# EAGLE board RFBoard_v4.0_1_ResonatorPCB_Marian_Oliver (EAGLE 7.7.0)
AUTHOR: Kirchschlager Raimund
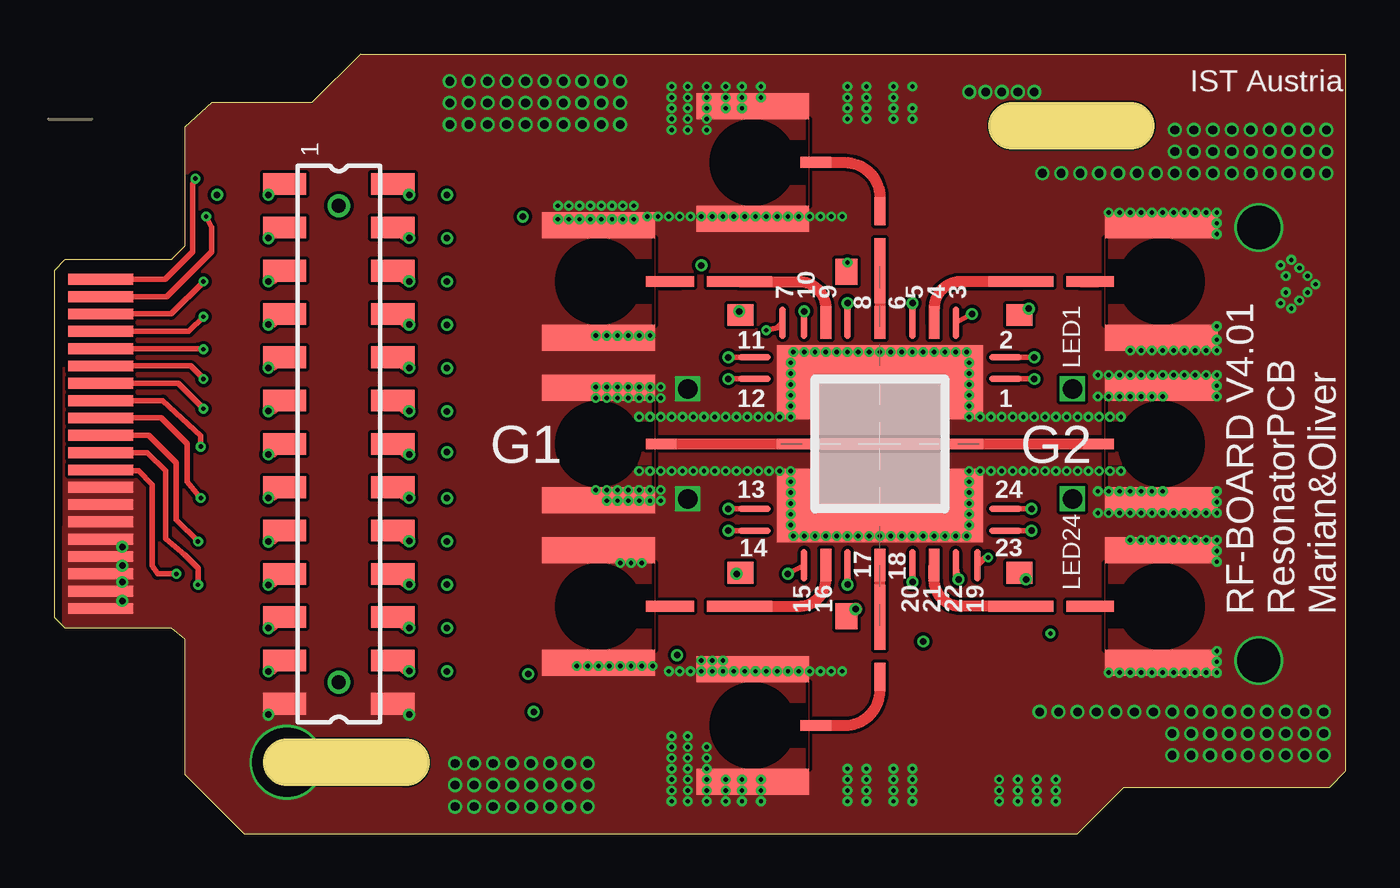
[diagram p0: board, top side]
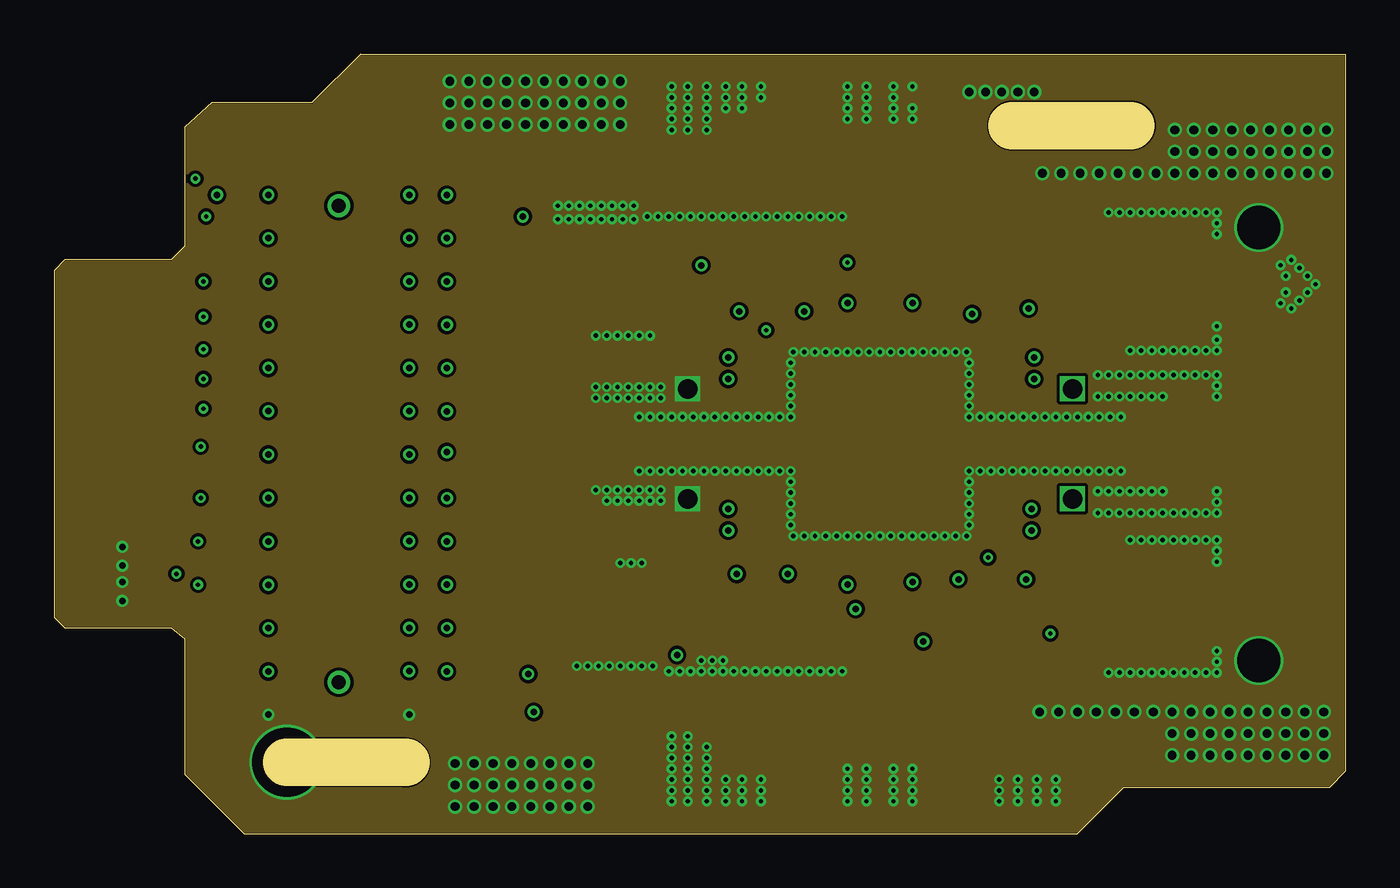
[diagram p1: board, inner layer Route2]
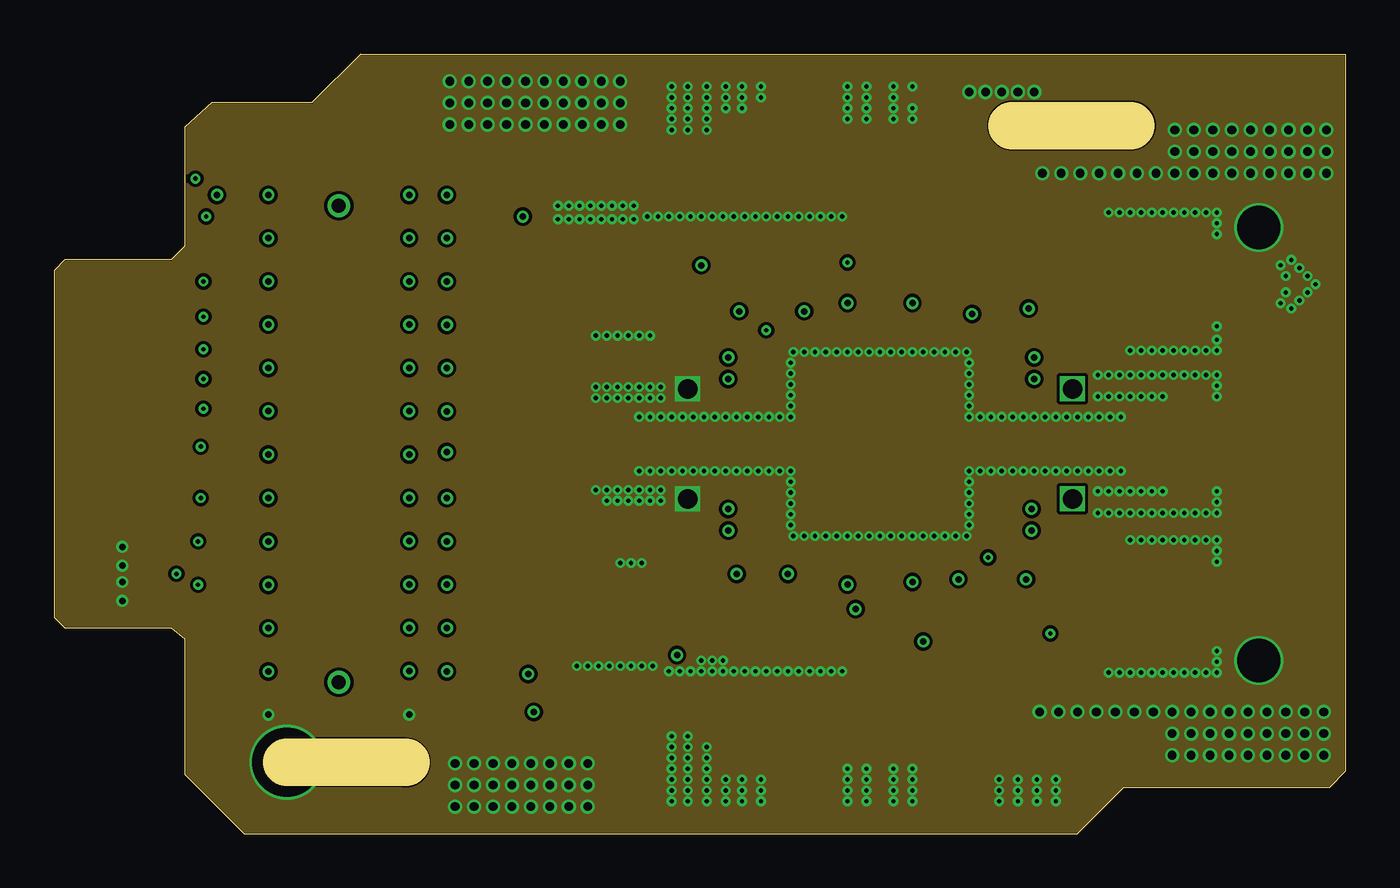
[diagram p2: board, inner layer Route3]
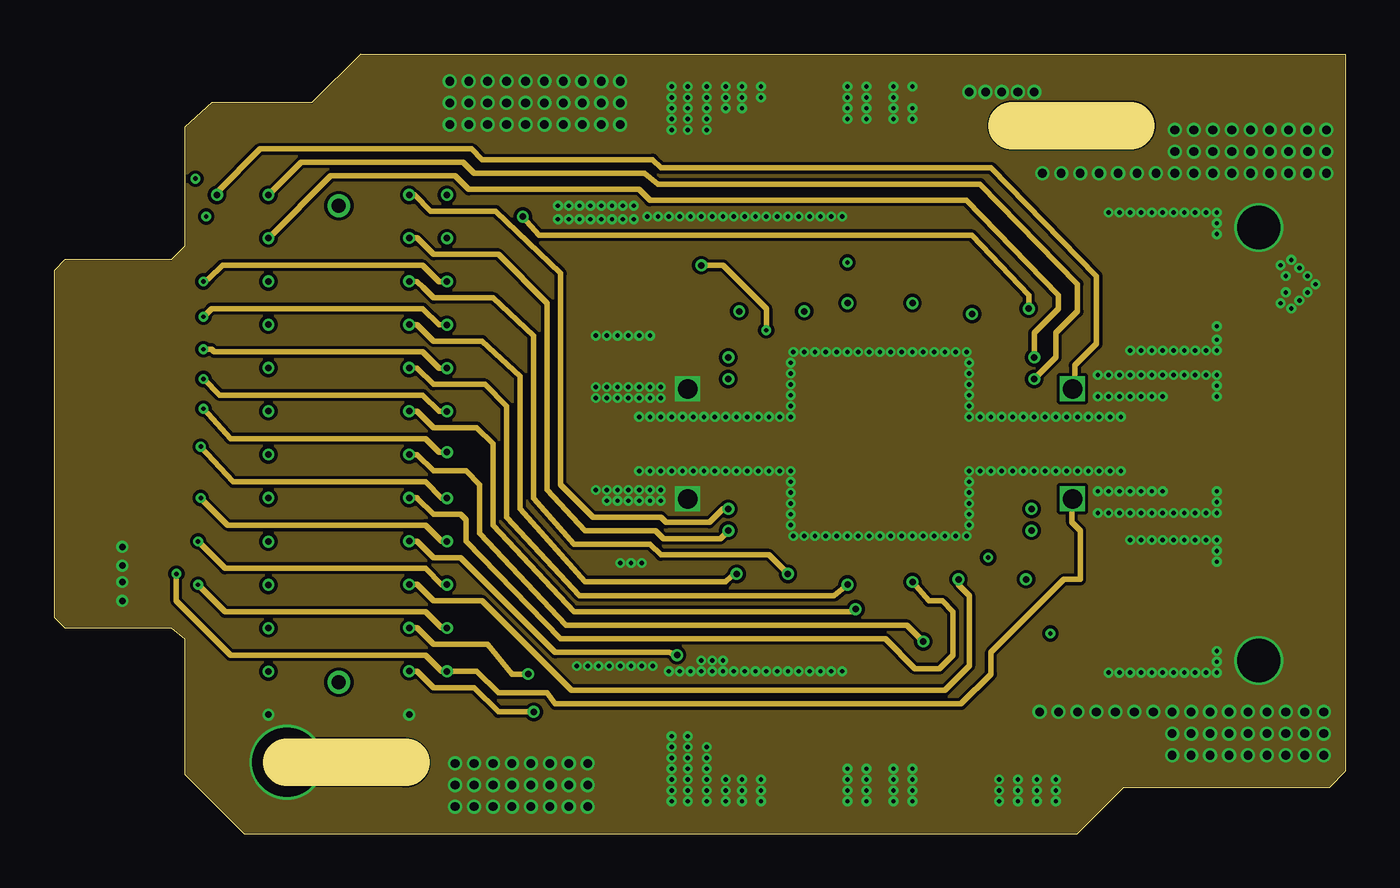
[diagram p3: board, inner layer Route14]
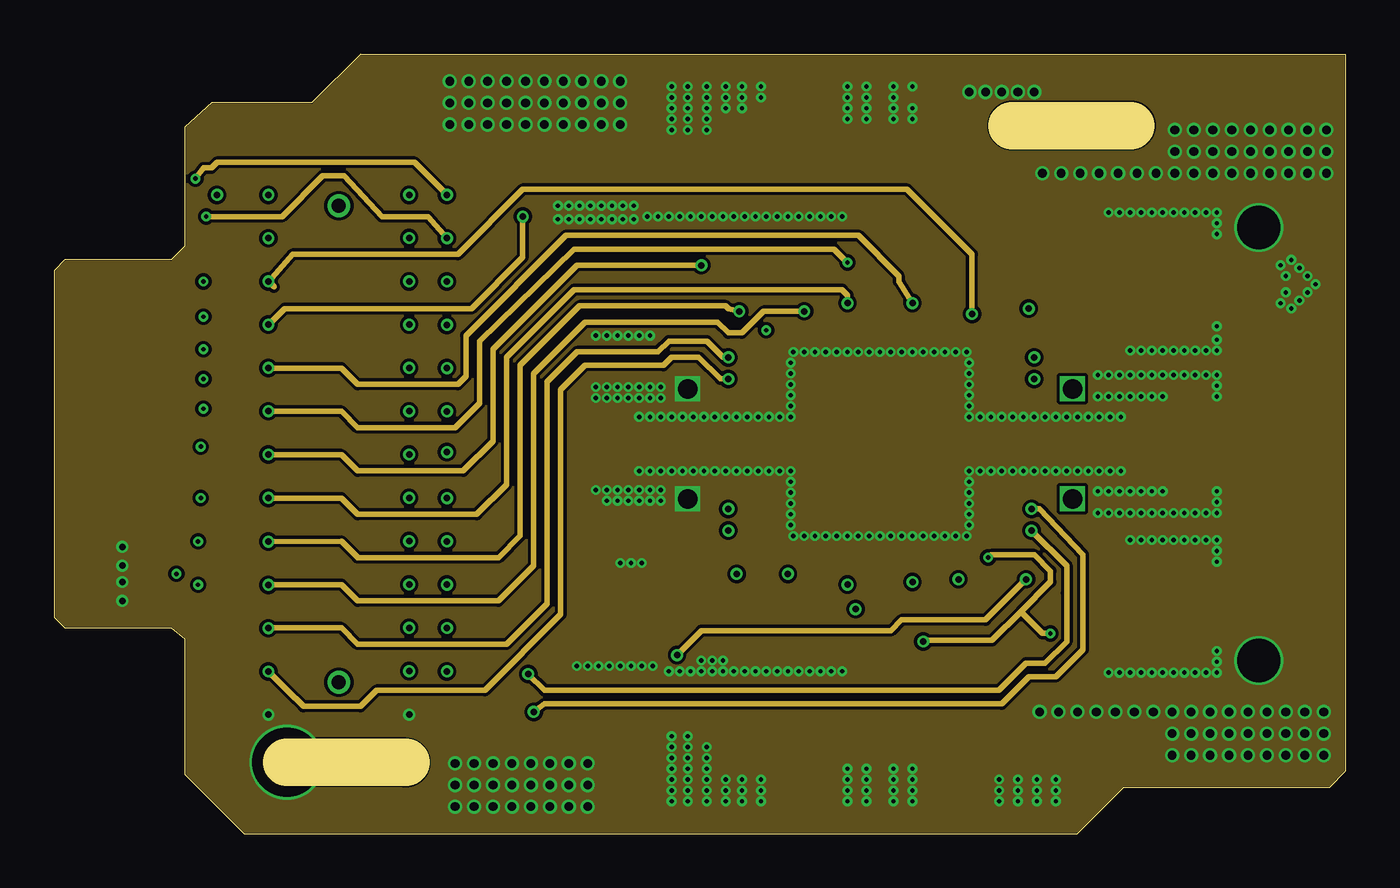
[diagram p4: board, inner layer Route15]
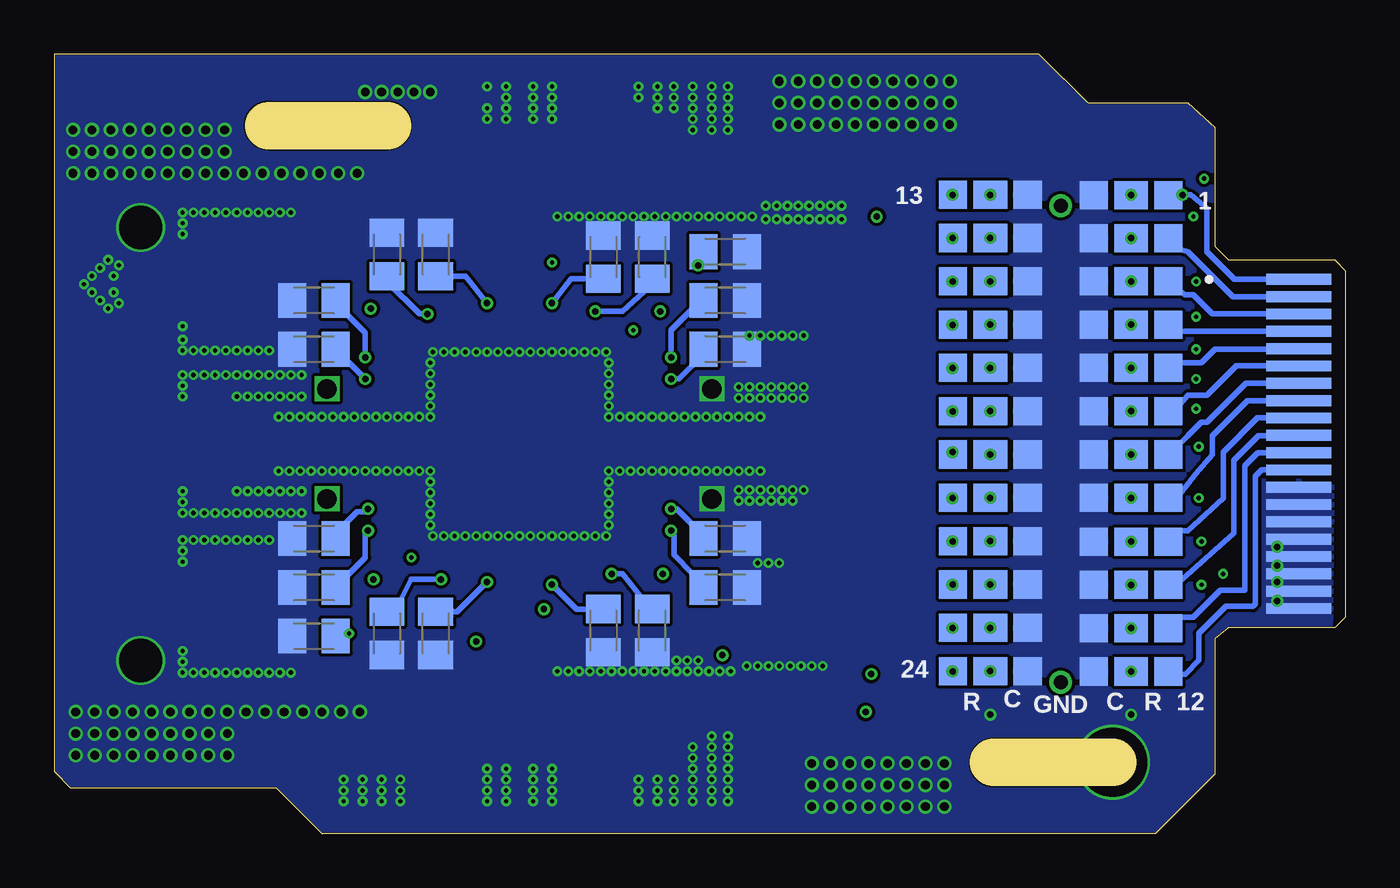
[diagram p5: board, bottom side, seen from below]

Size 59.65 x 36 mm. Coordinates in mm from the lower left corner, seen from the top.
Outline: 16.25,3.3 10.75,3.3
Outline: 49.75,32.7 44.25,32.7
Outline: 14.15,36 11.9,33.75 7.27,33.75 6.02,32.62 6.02,27.12 5.4,26.5 0.5,26.5 0,26 0,10 0.5,9.5 5.4,9.5 6.02,9 6.02,2.75 8.77,0 47.27,0 49.4,2.12 58.9,2.12 59.65,2.88 59.65,36 14.15,36
Copper layers (1+2+3*14+15+16): Top 0.035mm / dielectric 0.2mm / Route2 0.035mm / dielectric 1mm / Route3 0.035mm / dielectric 0.28mm / Route14 0.035mm / dielectric 0.36mm / Route15 0.035mm / dielectric 0.2mm / Bottom 0.035mm
Design rules "PCB-POOL HighSpec_ML6+ *": minimum track width 0.125mm, minimum drill 0.2mm, track to track 0.125mm, track to pad 0.125mm, pad to pad 0.125mm, via to via 0.125mm, smd to smd 0.125mm, copper to edge 2mil, drill to drill 0.2mm, minimum pad ring 0.2mm, minimum via ring 0.125mm, stop-mask expansion 0.065mm, vias tented up to drill 0.3mm, thermal gap 0mil
Net classes: 0 GND: clearance 0.15 mm; 1 RF: width 0.6 mm, clearance 0.75 mm; 2 RF2: width 0.6 mm, clearance 0.75 mm
tRestrict: area 23.1,8.5 to 27.1,12.5

## Footprints (pad centres in the part's own frame; a part is rotated, then mirrored left to right if it is on the bottom)
C0805K = smd 1.3 x 1.6: 1 -1,0; 2 1,0
SMP_STRAIGHT_MINI_WIDE_V1_01_ROUND = smd 0.5 x 1.4: 1 0,2.9 | smd 1.2 x 5.2: GND -2.6,0; GND@1 2.6,0
SAMTEC_MEC8-120-XX-X-D-EM2_MATCH = smd 0.5 x 3: 1 -7.6,0; 3 -6.8,0; 5 -6,0; 7 -5.2,0; 9 -4.4,0; 11 -3.6,0; 13 -2.8,0; 15 -2,0; 17 -1.2,0; 19 -0.4,0; 21 0.4,0; 23 1.2,0; 25 2,0; 27 2.8,0; 29 3.6,0; 31 4.4,0; 33 5.2,0; 35 6,0; 37 6.8,0; 39 7.6,0 | smd 0.5 x 3 bottom: 2 -7.6,0; 4 -6.8,0; 6 -6,0; 8 -5.2,0; 10 -4.4,0; 12 -3.6,0; 14 -2.8,0; 16 -2,0; 18 -1.2,0; 20 -0.4,0; 22 0.4,0; 24 1.2,0; 26 2,0; 28 2.8,0; 30 3.6,0; 32 4.4,0; 34 5.2,0; 36 6,0; 38 6.8,0; 40 7.6,0
LP-FILTER/1_STAGE/OS/0603_TOP = smd 1.3 x 1.3: $1 -1.6,0.01; $6 1.85,0.01 | smd 1.55 x 1.3: $4 0.125,0.01
LP-FILTER/1_STAGE/OS/0603_BOTTOM = smd 1.3 x 1.3 bottom: $1 -1.6,0.01; $6 1.85,0.01 | smd 1.55 x 1.3 bottom: $4 0.125,0.01
24DC+4FASTGATE+2RF/6.0X6.0_V2.11 = smd 1.5 x 0.3: DC§01 5.8,3; DC§02 5.8,4; DC§11 -5.8,4; DC§12 -5.8,3; DC§13 -5.8,-3; DC§14 -5.8,-4; DC§23 5.8,-4; DC§24 5.8,-3 | smd 0.3 x 1.5: DC§03 3.5,5.6; DC§05 1.5,5.6; DC§07 -4.5,5.6; DC§08 -1.5,5.6; DC§10 -3.5,5.6; DC§15 -3.5,-5.6; DC§17 -1.5,-5.6; DC§19 4.5,-5.6; DC§20 1.5,-5.6; DC§22 3.5,-5.6 | smd 0.5 x 1.5: DC§04 2.5,5.6; DC§06 0,5.6; DC§09 -2.5,5.6; DC§16 -2.5,-5.6; DC§18 0,-5.6; DC§21 2.5,-5.6 | smd 6.5 x 1.7: GND 0,3.7; GND5 0,-3.7 | smd 1.9 x 3.4: GND1 3.8,2.85; GND2 3.8,-2.85; GND3 -3.8,-2.85; GND4 -3.8,2.85 | smd 1.9 x 0.5: RF$1 -3.8,0; RF$2 3.8,0
BIAS_TEE_UP_0603_THIN = smd 1.3 x 0.5: HF 3.25,0 | smd 1.2 x 1: LF 0.45,-1.55 | smd 3 x 0.5: OUT 0.5,0
BIAS_TEE_DOWN_0603_THIN = smd 1.3 x 0.5: HF 3.25,0 | smd 1.2 x 1: LF 0.45,1.55 | smd 3 x 0.5: OUT 0.5,0
SMD2X13 = drill 0.65: MOUNT1 -11,0; MOUNT2 11,0 | smd 1 x 2: P$1 -12,-2.5; P$2 -12,2.5; P$3 -10,-2.5; P$4 -10,2.5; P$5 -8,-2.5; P$6 -8,2.5; P$7 -6,-2.5; P$8 -6,2.5; P$9 -4,-2.5; P$10 -4,2.5; P$11 -2,-2.5; P$12 -2,2.5; P$13 0,-2.5; P$14 0,2.5; P$15 2,-2.5; P$16 2,2.5; P$17 4,-2.5; P$18 4,2.5; P$19 6,-2.5; P$20 6,2.5; P$21 8,-2.5; P$22 8,2.5; P$23 10,-2.5; P$24 10,2.5; P$25 12,-2.5; P$26 12,2.5

## Placement (x,y rotation side)
C1  [C0805K]  47.65,22.38 0 bottom
C2  [C0805K]  47.65,24.62 0 bottom
C3  [C0805K]  44.27,26.75 270 bottom
C5  [C0805K]  42.02,26.75 270 bottom
C7  [C0805K]  28.65,26.88 180 bottom
C8  [C0805K]  34.27,26.62 270 bottom
C10  [C0805K]  32.02,26.62 270 bottom
C11  [C0805K]  28.65,24.62 180 bottom
C12  [C0805K]  28.65,22.38 180 bottom
C13  [C0805K]  28.65,13.62 180 bottom
C14  [C0805K]  28.65,11.38 180 bottom
C15  [C0805K]  32.02,9.38 90 bottom
C17  [C0805K]  34.27,9.38 90 bottom
C19  [C0805K]  47.65,9.12 0 bottom
C20  [C0805K]  42.02,9.25 90 bottom
C22  [C0805K]  44.27,9.25 90 bottom
C23  [C0805K]  47.65,11.38 0 bottom
C24  [C0805K]  47.65,13.62 0 bottom
G1  MC-921  [SMP_STRAIGHT_MINI_WIDE_V1_01_ROUND]  25.15,18 270 top
G2  MC-921  [SMP_STRAIGHT_MINI_WIDE_V1_01_ROUND]  51.15,18 90 top
J1  MEC8-120-XX-X-D-EM2MATCH  [SAMTEC_MEC8-120-XX-X-D-EM2_MATCH]  2.15,18 270 bottom
LP$1  LP-FILTER/1-STAGETOP  [LP-FILTER/1_STAGE/OS/0603_TOP]  9.77,29.5 180 bottom
LP$2  LP-FILTER/1-STAGETOP  [LP-FILTER/1_STAGE/OS/0603_TOP]  9.77,27.5 180 bottom
LP$3  LP-FILTER/1-STAGEBOT  [LP-FILTER/1_STAGE/OS/0603_BOTTOM]  9.77,25.5 0 top
LP$4  LP-FILTER/1-STAGEBOT  [LP-FILTER/1_STAGE/OS/0603_BOTTOM]  9.77,23.5 0 top
LP$5  LP-FILTER/1-STAGEBOT  [LP-FILTER/1_STAGE/OS/0603_BOTTOM]  9.77,21.5 0 top
LP$6  LP-FILTER/1-STAGEBOT  [LP-FILTER/1_STAGE/OS/0603_BOTTOM]  9.77,19.5 0 top
LP$7  LP-FILTER/1-STAGEBOT  [LP-FILTER/1_STAGE/OS/0603_BOTTOM]  9.77,17.5 0 top
LP$8  LP-FILTER/1-STAGEBOT  [LP-FILTER/1_STAGE/OS/0603_BOTTOM]  9.77,15.5 0 top
LP$9  LP-FILTER/1-STAGETOP  [LP-FILTER/1_STAGE/OS/0603_TOP]  9.77,13.5 180 bottom
LP$10  LP-FILTER/1-STAGETOP  [LP-FILTER/1_STAGE/OS/0603_TOP]  9.77,11.5 180 bottom
LP$11  LP-FILTER/1-STAGETOP  [LP-FILTER/1_STAGE/OS/0603_TOP]  9.77,9.5 180 bottom
LP$12  LP-FILTER/1-STAGETOP  [LP-FILTER/1_STAGE/OS/0603_TOP]  9.77,7.5 180 bottom
LP$13  LP-FILTER/1-STAGETOP  [LP-FILTER/1_STAGE/OS/0603_TOP]  16.52,29.5 0 bottom
LP$14  LP-FILTER/1-STAGETOP  [LP-FILTER/1_STAGE/OS/0603_TOP]  16.52,27.5 0 bottom
LP$15  LP-FILTER/1-STAGETOP  [LP-FILTER/1_STAGE/OS/0603_TOP]  16.52,25.5 0 bottom
LP$16  LP-FILTER/1-STAGETOP  [LP-FILTER/1_STAGE/OS/0603_TOP]  16.52,23.5 0 bottom
LP$17  LP-FILTER/1-STAGETOP  [LP-FILTER/1_STAGE/OS/0603_TOP]  16.52,21.5 0 bottom
LP$18  LP-FILTER/1-STAGETOP  [LP-FILTER/1_STAGE/OS/0603_TOP]  16.52,19.5 0 bottom
LP$19  LP-FILTER/1-STAGETOP  [LP-FILTER/1_STAGE/OS/0603_TOP]  16.52,17.5 0 bottom
LP$20  LP-FILTER/1-STAGETOP  [LP-FILTER/1_STAGE/OS/0603_TOP]  16.52,15.5 0 bottom
LP$21  LP-FILTER/1-STAGETOP  [LP-FILTER/1_STAGE/OS/0603_TOP]  16.52,13.5 0 bottom
LP$22  LP-FILTER/1-STAGETOP  [LP-FILTER/1_STAGE/OS/0603_TOP]  16.52,11.5 0 bottom
LP$23  LP-FILTER/1-STAGETOP  [LP-FILTER/1_STAGE/OS/0603_TOP]  16.52,9.5 0 bottom
LP$24  LP-FILTER/1-STAGETOP  [LP-FILTER/1_STAGE/OS/0603_TOP]  16.52,7.5 0 bottom
S$4  MC-921  [SMP_STRAIGHT_MINI_WIDE_V1_01_ROUND]  51.15,25.5 90 top
S$6  MC-921  [SMP_STRAIGHT_MINI_WIDE_V1_01_ROUND]  32.27,31 270 top
S$9  MC-921  [SMP_STRAIGHT_MINI_WIDE_V1_01_ROUND]  25.15,25.5 270 top
S$16  MC-921  [SMP_STRAIGHT_MINI_WIDE_V1_01_ROUND]  25.15,10.5 270 top
S$18  MC-921  [SMP_STRAIGHT_MINI_WIDE_V1_01_ROUND]  32.27,5 270 top
S$21  MC-921  [SMP_STRAIGHT_MINI_WIDE_V1_01_ROUND]  51.15,10.5 90 top
U$2  24DC+4FAST+2RF_NO_HOLETEST  [24DC+4FASTGATE+2RF/6.0X6.0_V2.11]  38.15,18 0 top
U$4  BIASTEETHINUP  [BIAS_TEE_UP_0603_THIN]  44.15,25.5 0 top
U$6  BIASTEETHIN  [BIAS_TEE_DOWN_0603_THIN]  38.15,25.5 90 top
U$9  BIASTEETHIN  [BIAS_TEE_DOWN_0603_THIN]  32.15,25.5 180 top
U$16  BIASTEETHINUP  [BIAS_TEE_UP_0603_THIN]  32.15,10.5 180 top
U$18  BIASTEETHINUP  [BIAS_TEE_UP_0603_THIN]  38.15,10.5 270 top
U$21  BIASTEETHIN  [BIAS_TEE_DOWN_0603_THIN]  44.15,10.5 0 top
X1  GND26  [SMD2X13]  13.15,18 270 top

## Library data of the parts
C1-C3 C5 C7 C8 C10-C15 C17 C19 C20 C22-C24 = rcl
G1 G2 S$4 S$6 S$9 S$16 S$18 S$21 = RF Connectors
J1 = MEC8-120-XX-X-D-EM2
LP$1-LP$24 = LPFilter
U$2 = SampleArea_new2
U$4 U$6 U$9 U$16 U$18 U$21 = Bias tee
X1 = GND_Connector

## Nets
C$1: J1.1 LP$1.$1
C$2: J1.3 LP$2.$1
C$3: J1.5 LP$3.$1
C$4: J1.7 LP$4.$1
C$5: J1.9 LP$5.$1
C$6: J1.11 LP$6.$1
C$7: J1.13 LP$7.$1
C$8: J1.15 LP$8.$1
C$9: J1.17 LP$9.$1
C$10: J1.19 LP$10.$1
C$11: J1.21 LP$11.$1
C$12: J1.23 LP$12.$1
C$13: J1.2 LP$13.$1
C$14: J1.4 LP$14.$1
C$15: J1.6 LP$15.$1
C$16: J1.8 LP$16.$1
C$17: J1.10 LP$17.$1
C$18: J1.12 LP$18.$1
C$19: J1.14 LP$19.$1
C$20: J1.16 LP$20.$1
C$21: J1.18 LP$21.$1
C$22: J1.20 LP$22.$1
C$23: J1.22 LP$23.$1
C$24: J1.24 LP$24.$1
D$1: C1.2 LP$1.$4 U$2.DC§01 X1.P$1
D$2: C2.2 LP$2.$4 U$2.DC§02 X1.P$3
D$3: C3.2 LP$3.$4 U$2.DC§03 X1.P$5
D$4: LP$4.$4 U$4.LF X1.P$7
D$5: C5.2 LP$5.$4 U$2.DC§05 X1.P$9
D$6: LP$6.$4 U$6.LF X1.P$11
D$7: C7.2 LP$7.$4 U$2.DC§07 X1.P$13
D$8: C8.2 LP$8.$4 U$2.DC§08 X1.P$15
D$9: LP$9.$4 U$9.LF X1.P$17
D$10: C10.2 LP$10.$4 U$2.DC§10 X1.P$19
D$11: C11.2 LP$11.$4 U$2.DC§11 X1.P$21
D$12: C12.2 LP$12.$4 U$2.DC§12 X1.P$23
D$13: C13.2 LP$13.$4 U$2.DC§13 X1.P$2
D$14: C14.2 LP$14.$4 U$2.DC§14 X1.P$4
D$15: C15.2 LP$15.$4 U$2.DC§15 X1.P$6
D$16: LP$16.$4 U$16.LF X1.P$8
D$17: C17.2 LP$17.$4 U$2.DC§17 X1.P$10
D$18: LP$18.$4 U$18.LF X1.P$12
D$19: C19.2 LP$19.$4 U$2.DC§19 X1.P$14
D$20: C20.2 LP$20.$4 U$2.DC§20 X1.P$16
D$21: LP$21.$4 U$21.LF X1.P$18
D$22: C22.2 LP$22.$4 U$2.DC§22 X1.P$20
D$23: C23.2 LP$23.$4 U$2.DC§23 X1.P$22
D$24: C24.2 LP$24.$4 U$2.DC§24 X1.P$24
F$4 [RF]: U$2.DC§04 U$4.OUT
F$6 [RF]: U$2.DC§06 U$6.OUT
F$9 [RF]: U$2.DC§09 U$9.OUT
F$16 [RF]: U$2.DC§16 U$16.OUT
F$18 [RF]: U$2.DC§18 U$18.OUT
F$21 [RF]: U$2.DC§21 U$21.OUT
GND: C1.1 C2.1 C3.1 C5.1 C7.1 C8.1 C10.1 C11.1 C12.1 C13.1 C14.1 C15.1 C17.1 C19.1 C20.1 C22.1 C23.1 C24.1 G1.GND G1.GND@1 G2.GND G2.GND@1 J1.25 J1.26 J1.27 J1.28 J1.29 J1.30 J1.31 J1.32 J1.33 J1.34 J1.35 J1.36 J1.37 J1.38 J1.39 J1.40 LP$1.$6 LP$2.$6 LP$3.$6 LP$4.$6 LP$5.$6 LP$6.$6 LP$7.$6 LP$8.$6 LP$9.$6 LP$10.$6 LP$11.$6 LP$12.$6 LP$13.$6 LP$14.$6 LP$15.$6 LP$16.$6 LP$17.$6 LP$18.$6 LP$19.$6 LP$20.$6 LP$21.$6 LP$22.$6 LP$23.$6 LP$24.$6 S$4.GND S$4.GND@1 S$6.GND S$6.GND@1 S$9.GND S$9.GND@1 S$16.GND S$16.GND@1 S$18.GND S$18.GND@1 S$21.GND S$21.GND@1 U$2.GND U$2.GND1 U$2.GND2 U$2.GND3 U$2.GND4 U$2.GND5 X1.P$25 X1.P$26
N$1 [RF]: S$16.1 U$16.HF
N$2 [RF]: S$21.1 U$21.HF
N$4 [RF]: S$4.1 U$4.HF
N$5 [RF]: S$9.1 U$9.HF
N$6 [RF]: G1.1 G2.1 U$2.RF$1 U$2.RF$2
N$7 [RF]: S$6.1 U$6.HF
N$8 [RF]: S$18.1 U$18.HF

## Tracks (layer width: path | path; a pad name or v marks a point on that pad's centre or on a via)
C$1  (via drill 0.3, 0.9)
  Route14 0.254: v7.52,29.5 7.52,29.62 9.52,31.62 19.27,31.62 19.77,31.12 27.65,31.12 28.02,30.75 43.27,30.75 48.15,25.75 48.15,22.62 47.15,21.62 47.15,20.65 v47.04,20.54
  Bottom 0.254: v7.52,29.5 v7.54,29.49 LP$1.$1 7.15,29.5 6.4,28.88 6.4,26.88 5.12,25.6 J1.1
C$2
  Bottom 0.254: J1.3 5.2,24.8 7.27,26.88 7.66,27 LP$2.$1
C$3
  Bottom 0.254: LP$3.$1 8.15,25.5 7.41,24.88 7.04,24.88 6.15,24 J1.5
C$4
  Bottom 0.254: LP$4.$1 8.06,23.62 8.02,23.62 7.6,23.2 J1.7
C$5
  Bottom 0.254: LP$5.$1 7.91,21.75 6.65,21.75 6.02,22.38 1.42,22.38 J1.9
C$6
  Bottom 0.254: 7.79,19.51 7.77,19.5 7.77,19.38 8.02,19.38 | J1.11 5.05,21.6 6.4,20.25 7.27,20.25 8.02,19.38 | 8.02,19.38 8.04,19.38 LP$6.$1
C$7
  Bottom 0.254: LP$7.$1 8.06,17.62 7.27,18.38 6.65,19 6.4,19 4.6,20.8 J1.13
C$8
  Bottom 0.254: J1.15 4.52,20 6.15,18.38 6.15,17.5 6.9,16.62 7.4,16 7.77,15.5 7.77,15.51 LP$8.$1
C$9
  Bottom 0.254: J1.17 4.07,19.2 5.65,17.62 5.65,15.5 7.27,14 7.79,14 LP$9.$1
C$10
  Bottom 0.254: LP$10.$1 7.54,11.74 5.15,13.88 5.15,17.25 4.02,18.38 2.17,18.38 J1.19
C$11
  Bottom 0.254: J1.21 4.05,17.6 4.65,17 4.65,11.25 5.77,11.25 7.02,10 7.79,10 LP$11.$1
C$12
  Bottom 0.254: J1.23 3.85,16.8 4.15,16.5 4.15,10.62 4.27,10.5 5.52,10.5 6.77,9.25 6.77,8 7.4,7.38 8.06,7.38 LP$12.$1
C$13  (via drill 0.2, 0.3)
  Top 0.254: J1.2 5.12,25.6 6.4,26.88 6.4,30 v6.52,30.25
  Route15 0.254: v18.15,29.5 16.65,31 7.52,31 7.27,30.75 6.9,30.75 v6.52,30.25
  Bottom 0.254: LP$13.$1 18.12,29.4 v18.15,29.5
C$14  (via drill 0.2, 0.3)
  Top 0.254: J1.4 5.2,24.8 7.27,26.88 7.27,28 v7.02,28.5
  Route15 0.254: v18.15,27.5 17.27,28.5 15.15,28.5 13.4,30.38 12.4,30.38 10.52,28.5 v7.02,28.5
  Bottom 0.254: LP$14.$1 18.12,27.52 v18.15,27.5
C$15  (via drill 0.2, 0.3)
  Top 0.254: v6.9,25.5 5.4,24 J1.6
  Route14 0.254: v18.15,25.5 17.77,25.5 17.02,26.25 7.77,26.25 7.15,25.62 v6.9,25.5
  Bottom 0.254: LP$15.$1 18.12,25.48 v18.15,25.5
C$16  (via drill 0.2, 0.3)
  Top 0.254: J1.8 6.22,23.2 v6.9,23.88
  Route14 0.254: v18.15,23.5 17.77,23.5 17.02,24.25 7.27,24.25 v6.9,23.88
  Bottom 0.254: LP$16.$1 18.12,23.4 v18.15,23.5
C$17  (via drill 0.2, 0.3)
  Top 0.254: J1.10 6.62,22.4 v6.9,22.38
  Route14 0.254: v18.15,21.5 17.77,21.5 17.02,22.25 7.4,22.25 7.27,22.38 v6.9,22.38
  Bottom 0.254: v18.15,21.5 18.15,21.54 LP$17.$1
C$18  (via drill 0.2, 0.3)
  Top 0.254: J1.12 6.3,21.6 v6.9,21
  Route14 0.254: v18.15,19.5 17.77,19.5 17.02,20.25 7.65,20.25 v6.9,21
  Bottom 0.254: LP$18.$1 18.12,19.9 v18.15,19.5
C$19  (via drill 0.2, 0.3)
  Top 0.254: J1.14 5.73,20.8 v6.9,19.62
  Route14 0.254: v18.15,17.62 17.77,17.62 17.15,18.25 8.15,18.25 v6.9,19.62
  Bottom 0.254: LP$19.$1 18.12,17.6 v18.15,17.62
C$20  (via drill 0.2, 0.3)
  Top 0.254: J1.16 5.02,20 6.77,18.38 v6.77,17.88
  Route14 0.254: v18.15,15.5 17.9,15.5 17.15,16.25 8.27,16.25 v6.77,17.88
  Bottom 0.254: v18.15,15.5 18.15,15.54 LP$20.$1
C$21  (via drill 0.2, 0.3)
  Top 0.254: J1.18 4.95,19.2 6.15,18 6.15,16.25 v6.77,15.5
  Route14 0.254: v18.15,13.5 17.9,13.5 17.15,14.25 8.02,14.25 v6.77,15.5
  Bottom 0.254: v18.15,13.5 18.15,13.54 LP$21.$1
C$22  (via drill 0.2, 0.3)
  Top 0.254: J1.20 4.38,18.4 5.65,17.12 5.65,14.5 v6.65,13.5
  Route14 0.254: v18.15,11.5 17.9,11.5 17.15,12.25 7.9,12.25 v6.65,13.5
  Bottom 0.254: LP$22.$1 18.12,11.47 v18.15,11.5
C$23  (via drill 0.2, 0.3)
  Top 0.254: J1.22 4.3,17.6 5.15,16.75 5.15,13.62 6.02,12.88 6.65,12.25 v6.65,11.5
  Route14 0.254: v18.15,9.5 17.9,9.5 17.15,10.25 7.9,10.25 v6.65,11.5
  Bottom 0.254: v18.15,9.5 18.15,9.54 LP$23.$1
C$24  (via drill 0.2, 0.3, 0.9)
  Top 0.254: v5.65,12 4.77,12 4.52,12.38 4.52,16.12 3.9,16.75 2.2,16.75 J1.24
  Route14 0.254: v47.04,15.46 47.02,15.45 47.02,14.38 47.4,14 47.4,11.75 46.65,11.75 43.27,8.38 43.27,7.38 41.9,6 23.15,6 22.77,6.5 20.52,6.5 19.52,7.5 v18.15,7.5 LP$24.$1 18.11,7.5 17.9,7.5 17.15,8.25 8.15,8.25 5.65,10.75 v5.65,12
  Bottom 0.254: LP$24.$1 18.12,7.47 v18.15,7.5
D$1  (via drill 0.3)
  Top 0.254: X1.P$1 v9.9,29.5 | U$2.DC§01 v45.27,21
  Route14 0.254: v45.27,21 46.27,22 46.27,23.12 47.27,24.12 47.27,25.38 42.77,30 27.9,30 27.27,30.5 19.4,30.5 18.9,31 11.4,31 v9.9,29.5
  Bottom 0.25: C1.2 v45.27,21
  Bottom 0.254: v9.9,29.5 LP$1.$4
D$2  (via drill 0.3)
  Top 0.254: X1.P$3 v9.9,27.5 | U$2.DC§02 v45.27,22
  Route14 0.254: v45.27,22 45.27,23.12 46.4,24.25 46.4,24.88 42.15,29.25 27.52,29.25 27.02,29.75 19.15,29.75 18.52,30.38 12.77,30.38 v9.9,27.5
  Bottom 0.25: C2.2 46.65,24.5 45.27,23.12 v45.27,22
  Bottom 0.254: v9.9,27.5 9.52,27.87 LP$2.$4
D$3  (via drill 0.3)
  Top 0.254: U$2.DC§03 v42.4,24 | LP$3.$4 10.16,25.51 X1.P$5
  Route15 0.254: v42.4,24 42.4,26.75 39.4,29.75 21.65,29.75 18.65,26.75 11.02,26.75 LP$3.$4 10.16,25.25 LP$3.$4
  Bottom 0.25: C3.2 44.15,25.75 44.27,25.5 42.77,24 v42.4,24
  other vias: 9.9,25.51
D$4  (via drill 0.3)
  Top 0.254: U$4.LF 44.85,23.95 v45.02,24.25 | LP$4.$4 10.16,23.51 X1.P$7
  Route14 0.254: v45.02,24.25 45.02,24.88 42.4,27.62 22.4,27.62 v21.65,28.5
  Route15 0.254: v21.65,28.5 21.65,26.62 19.27,24.25 10.66,24.25 LP$4.$4
  other vias: 9.9,23.51
D$5  (via drill 0.3)
  Top 0.254: U$2.DC§05 v39.65,24.5 | LP$5.$4 10.16,21.51 X1.P$9
  Route15 0.254: LP$5.$4 13.27,21.5 14.02,20.75 18.65,20.75 19.02,21.12 19.02,23 23.65,27.62 37.15,27.62 39.02,25.75 39.02,25.5 v39.65,24.5
  Bottom 0.25: C5.2 40.65,25.75 v39.65,24.5
  other vias: 9.9,21.51
D$6  (via drill 0.2, 0.3)
  Top 0.254: LP$6.$4 10.16,19.51 X1.P$11 | v36.65,26.38 36.65,26.27 U$6.LF
  Route15 0.254: v36.65,26.38 36.02,27 24.02,27 19.65,22.75 19.65,19.88 18.52,18.75 14.02,18.75 13.27,19.5 LP$6.$4
  other vias: 9.9,19.51
D$7  (via drill 0.2, 0.3)
  Top 0.254: LP$7.$4 10.16,17.51 X1.P$13 | v32.9,23.25 33.42,23.38 U$2.DC§07
  Route14 0.254: v29.9,26.25 30.9,26.25 32.9,24.25 v32.9,23.25
  Route15 0.254: v29.9,26.25 24.15,26.25 20.27,22.38 20.27,18.12 18.9,16.75 14.02,16.75 13.27,17.5 LP$7.$4
  Bottom 0.254: C7.2 29.65,26.5 v29.9,26.25
  other vias: 9.9,17.51
D$8  (via drill 0.3)
  Top 0.254: U$2.DC§08 v36.65,24.5 | LP$8.$4 10.16,15.51 X1.P$15
  Route15 0.254: v36.65,24.5 36.65,24.88 36.4,25.12 24.02,25.12 20.9,22 20.9,16.12 19.52,14.75 14.02,14.75 13.27,15.5 LP$8.$4
  Bottom 0.25: C8.2 35.77,25.62 v36.65,24.5
  other vias: 9.9,15.51
D$9  (via drill 0.3)
  Top 0.254: U$9.LF 31.45,23.95 v31.65,24.12 | LP$9.$4 10.14,13.49 X1.P$17
  Route15 0.254: v31.65,24.12 31.15,24.25 31.02,24.38 24.27,24.38 21.52,21.62 21.52,13.75 20.52,12.75 14.01,12.75 14.01,12.76 13.27,13.5 LP$9.$4
  other vias: 9.9,13.49
D$10  (via drill 0.3)
  Top 0.254: U$2.DC§10 v34.65,24.12 | LP$10.$4 10.14,11.49 X1.P$19 10.4,12 LP$10.$4 9.9,11.38
  Route15 0.254: v34.65,24.12 32.77,24.12 31.77,23.12 31.15,23.12 30.65,23.62 24.52,23.62 22.15,21.25 22.15,12.38 20.52,10.75 14.02,10.75 13.27,11.5 LP$10.$4
  Bottom 0.25: C10.2 31.9,25.5 33.4,24.12 v34.65,24.12
  other vias: 9.9,11.49
D$11  (via drill 0.3)
  Top 0.254: U$2.DC§11 v31.15,22 | LP$11.$4 10.14,9.49 X1.P$21
  Route15 0.254: v31.15,22 30.9,22 30.15,22.75 28.4,22.75 27.9,22.25 24.15,22.25 22.77,20.88 22.77,10.62 20.9,8.75 14.02,8.75 13.27,9.5 10.01,9.5 LP$11.$4
  Bottom 0.25: C11.2 29.9,24.5 31.15,23.25 v31.15,22
  other vias: 9.9,9.49
D$12  (via drill 0.3)
  Top 0.254: U$2.DC§12 v31.15,21 | LP$12.$4 10.14,7.49 X1.P$23
  Route15 0.254: v31.15,21 30.77,21 29.77,22 28.52,22 28.15,21.62 24.52,21.62 23.4,20.5 23.4,10.12 19.9,6.62 14.9,6.62 14.15,5.88 11.52,5.88 11.15,6.25 11.14,6.25 LP$12.$4
  Bottom 0.25: C12.2 29.65,22.12 30.77,21 v31.15,21
  other vias: 9.9,7.49
D$13  (via drill 0.3)
  Top 0.254: X1.P$2 16.4,30 v16.4,29.5 | U$2.DC§13 v31.15,15
  Route14 0.254: v31.15,15 30.9,15 30.27,14.38 28.27,14.38 28.02,14.62 24.9,14.62 23.4,16.12 23.4,25.88 20.4,28.75 17.4,28.75 16.65,29.5 v16.4,29.5
  Bottom 0.25: C13.2 29.65,13.75 30.9,15 v31.15,15
  Bottom 0.254: v16.4,29.5 16.9,30.01 LP$13.$4
D$14  (via drill 0.3)
  Top 0.254: U$2.DC§14 v31.15,14 | LP$14.$4 16.14,27.51 X1.P$4
  Route14 0.254: v31.15,14 30.77,13.62 28.15,13.62 27.77,14 24.52,14 22.77,15.88 22.77,24.5 20.52,26.75 17.54,26.75 16.9,27.38 16.76,27.51 LP$14.$4
  Bottom 0.25: C14.2 30.15,12 31.02,12.88 31.02,13.88 v31.15,14
  other vias: 16.4,27.51
D$15  (via drill 0.3)
  Top 0.254: U$2.DC§15 v33.9,12 | LP$15.$4 16.14,25.51 X1.P$6
  Route14 0.254: v33.9,12 33.02,12.88 28.02,12.88 27.52,13.38 24.02,13.38 22.15,15.5 22.15,23 20.27,24.75 17.54,24.75 17.04,25.24 16.77,25.5 LP$15.$4
  Bottom 0.25: C15.2 32.4,10.75 33.4,12 v33.9,12
  other vias: 16.4,25.51
D$16  (via drill 0.3)
  Top 0.254: U$16.LF 31.32,12.05 v31.52,12 | LP$16.$4 16.14,23.51 X1.P$8
  Route14 0.254: v31.52,12 31.27,11.88 31.02,11.62 24.52,11.62 21.52,15 21.52,21.12 19.77,22.75 17.54,22.75 16.77,23.5 16.76,23.51 LP$16.$4
  other vias: 16.4,23.51
D$17  (via drill 0.3)
  Top 0.254: U$2.DC§17 v36.65,11.5 | LP$17.$4 16.14,21.51 X1.P$10
  Route14 0.254: v36.65,11.5 36.02,11 24.27,11 20.9,14.62 20.9,19.75 19.9,20.75 17.52,20.75 16.77,21.5 LP$17.$4
  Bottom 0.25: C17.2 35.52,10.38 v36.65,11.5
  other vias: 16.4,21.51
D$18  (via drill 0.3)
  Top 0.254: LP$18.$4 16.14,19.51 X1.P$12
  Top 0.61: U$18.LF 36.73,10.07 v37.02,10.38
  Route14 0.254: v37.02,10.38 36.9,10.25 24.02,10.25 20.27,14.25 20.27,18 19.52,18.75 17.54,18.75 16.9,19.38 16.76,19.51 LP$18.$4
  other vias: 16.4,19.51
D$19  (via drill 0.2, 0.3)
  Top 0.254: LP$19.$4 16.14,17.51 X1.P$14 | v43.15,12.75 43,12.75 U$2.DC§19
  Route14 0.254: v40.15,8.88 39.4,9.62 23.65,9.62 19.65,13.88 19.65,16.12 19.02,16.75 17.52,16.75 16.77,17.5 LP$19.$4
  Route15 0.254: 40.23,8.93 43.32,8.93 44.65,10.25 | 44.65,10.25 46.02,11.62 46.02,12.12 45.27,12.88 43.27,12.88 v43.15,12.75 | v46.02,9.25 45.65,9.25 44.65,10.25
  Route15 0.305: 40.23,8.93 v40.15,8.88
  Bottom 0.254: C19.2 v46.02,9.25
  other vias: 16.4,17.51
D$20  (via drill 0.3)
  Top 0.254: U$2.DC§20 v39.65,11.62 | LP$20.$4 16.14,15.51 X1.P$16
  Route14 0.254: v39.65,11.62 40.4,10.75 41.02,10.75 41.52,10.25 41.52,8.25 40.9,7.62 39.77,7.62 38.4,9 23.4,9 19.02,13.5 19.02,14.5 18.77,14.75 17.54,14.75 16.77,15.5 16.76,15.51 LP$20.$4
  Bottom 0.25: C20.2 41.02,10.25 v39.65,11.62
  other vias: 16.4,15.51
D$21  (via drill 0.3)
  Top 0.254: U$21.LF 44.98,12.05 v44.9,11.75 | LP$21.$4 16.14,13.51 X1.P$18
  Route14 0.254: v28.77,8.25 28.4,8.38 23.15,8.38 18.77,12.75 17.52,12.75 16.76,13.51 LP$21.$4
  Route15 0.254: v44.9,11.75 43.02,9.88 39.15,9.88 38.65,9.38 29.9,9.38 v28.77,8.25
  other vias: 16.4,13.51
D$22  (via drill 0.3)
  Top 0.254: U$2.DC§22 v41.77,11.75 | LP$22.$4 16.14,11.51 X1.P$20
  Route14 0.254: v41.77,11.75 41.77,11.5 42.27,11 42.27,7.75 41.15,6.62 23.9,6.62 19.77,10.75 17.52,10.75 16.76,11.51 LP$22.$4
  Bottom 0.25: C22.2 43.77,10.5 43.15,11.75 v41.77,11.75
  other vias: 16.4,11.51
D$23  (via drill 0.3)
  Top 0.254: U$2.DC§23 v45.15,14 | LP$23.$4 16.14,9.51 X1.P$22
  Route14 0.254: v21.9,7.38 21.15,7.38 20.02,8.75 17.52,8.75 16.76,9.51 LP$23.$4
  Route15 0.254: v45.15,14 46.77,12.38 46.77,11.12 46.77,8.88 45.77,7.88 44.9,7.88 43.65,6.62 42.27,6.62 22.65,6.62 v21.9,7.38
  Bottom 0.25: C23.2 45.27,12.75 45.27,13.88 v45.15,14
  other vias: 16.4,9.51
D$24  (via drill 0.3)
  Top 0.254: U$2.DC§24 v45.15,15 | LP$24.$4 16.14,7.51 X1.P$24
  Route14 0.254: v22.15,5.62 20.52,5.62 19.4,6.75 17.52,6.75 16.76,7.51 LP$24.$4
  Route15 0.254: v45.15,15 45.52,15 47.52,12.88 47.52,8.5 46.27,7.25 45.02,7.25 43.77,6 22.65,6 v22.15,5.62
  Bottom 0.25: C24.2 46.65,13.88 45.65,14.88 45.27,14.88 v45.15,15
  other vias: 16.4,7.51
F$4
  Top 0.5: U$4.OUT 41.9,25.5 arc90 40.65,24.25 U$2.DC§04
F$6
  Top 0.5: U$6.OUT U$2.DC§06
F$9
  Top 0.5: U$9.OUT 34.4,25.5 arc-90 35.65,24.25 U$2.DC§09
F$16
  Top 0.5: U$16.OUT 34.4,10.5 arc90 35.65,11.75 U$2.DC§16
F$18
  Top 0.5: U$18.OUT U$2.DC§18
F$21
  Top 0.5: U$21.OUT 41.9,10.5 arc-90 40.65,11.75 U$2.DC§21
GND  (via drill 0.2, 0.3, 0.4, 0.9, 2, 3.2)
  other vias: 30.15,34.5 30.15,34 30.15,33.5 30.15,33 30.15,32.5 29.27,34.5 29.27,34 29.27,33.5 29.27,33 29.27,32.5 28.52,32.5 28.52,33 28.52,33.5 28.52,34 28.52,34.5 50.71,20.19 48.21,21.19 48.71,21.19 49.21,21.19 49.71,21.19 50.21,21.19 48.21,20.19 48.71,20.19 49.21,20.19 49.71,20.19 50.21,20.19 48.21,15.81 48.71,15.81 49.21,15.81 49.71,15.81 50.21,15.81 50.71,15.81 51.21,15.81 48.21,14.81 48.71,14.81 49.21,14.81 49.71,14.81 50.21,14.81 50.71,14.81 32.65,34.5 32.65,34 31.77,34.5 31.77,34 31.77,33.5 31.02,33.5 31.02,34 31.02,34.5 36.65,34.5 36.65,34 36.65,33.5 36.65,33 39.65,34.5 39.65,33.5 39.65,33 37.52,34.5 37.52,34 37.52,33.5 37.52,33 38.77,33 38.77,33.5 38.77,34 38.77,34.5 36.65,3 36.65,2.5 36.65,2 36.65,1.5 37.52,3 37.52,2.5 37.52,2 37.52,1.5 39.65,3 39.65,2.5 39.65,2 39.65,1.5 38.77,1.5 38.77,2 38.77,2.5 38.77,3 43.65,2.5 43.65,2 43.65,1.5 44.52,1.5 44.52,2 44.52,2.5 45.4,2.5 45.4,2 45.4,1.5 25.02,15.88 28.02,16.75 27.52,16.75 27.02,16.75 28.52,19.25 28.02,19.25 27.52,19.25 27.02,19.25 25.52,20.62 26.02,15.38 26.52,15.38 27.02,15.38 27.52,15.38 28.02,15.38 25.52,15.38 28.02,20.62 27.52,20.62 27.02,20.62 26.52,20.62 26.02,20.62 46.27,1.5 46.27,2 46.27,2.5 30.15,4 30.15,3.5 30.15,3 30.15,2.5 30.15,2 30.15,1.5 29.27,4.5 29.27,4 29.27,3.5 29.27,3 29.27,2.5 29.27,2 29.27,1.5 28.52,1.5 28.52,2 28.52,2.5 28.52,3 28.52,3.5 28.52,4 28.52,4.5 32.65,2.5 32.65,2 32.65,1.5 31.77,2.5 31.77,2 31.77,1.5 31.02,1.5 31.02,2 31.02,2.5 29.02,19.25 29.52,19.25 30.02,19.25 30.52,19.25 31.02,19.25 31.52,19.25 32.02,19.25 32.52,19.25 28.52,16.75 29.02,16.75 29.52,16.75 30.02,16.75 30.52,16.75 31.02,16.75 31.52,16.75 32.02,16.75 32.52,16.75 51.21,20.19 50.71,21.19 51.21,21.19 51.21,14.81 25.02,20.62 25.02,20.12 26.02,15.88 26.52,15.88 27.02,15.88 27.52,15.88 28.02,15.88 25.02,15.88 25.52,15.88 25.52,20.12 27.52,20.12 27.02,20.12 26.52,20.12 26.02,20.12 25.02,20.12 33.02,19.25 33.52,19.25 33.02,16.75 33.52,16.75 42.77,19.25 34.02,19.25 34.02,16.75 34.02,19.75 34.02,20.25 34.02,20.75 34.02,21.25 34.02,21.75 34.15,22.25 34.65,22.25 35.15,22.25 34.02,16.25 34.02,15.75 34.02,15.25 34.02,14.75 34.02,14.25 34.15,13.75 34.65,13.75 35.15,13.75 35.65,13.75 36.15,13.75 29.26,20.54 29.26,15.46 42.27,14.25 36.65,13.75 37.15,13.75 37.65,13.75 41.15,22.25 41.65,22.25 42.15,22.25 42.27,21.75 42.27,21.25 42.27,20.75 42.27,20.25 42.27,19.75 42.27,19.25 38.15,13.75 38.65,13.75 39.15,13.75 39.65,13.75 40.15,13.75 40.65,13.75 41.15,13.75 41.65,13.75 42.15,13.75 25.02,23 25.52,23 26.02,23 26.52,23 27.02,23 27.52,23 26.27,29 25.77,29 25.27,29 24.77,29 24.27,29 23.77,29 26.77,29 28.02,20.12 42.77,16.75 42.27,16.75 42.27,16.25 42.27,15.75 42.27,15.25 42.27,14.75 43.27,19.25 43.77,19.25 44.27,19.25 44.77,19.25 45.27,19.25 43.27,16.75 43.77,16.75 44.27,16.75 44.77,16.75 45.77,19.25 46.27,19.25 46.77,19.25 47.27,19.25 47.77,19.25 48.27,19.25 48.77,19.25 49.27,19.25 45.27,16.75 45.77,16.75 46.27,16.75 46.77,16.75 47.27,16.75 47.77,16.75 48.27,16.75 48.77,16.75 49.27,16.75 50.21,22.31 49.71,22.31 50.71,22.31 51.21,22.31 51.71,22.31 52.21,22.31 52.71,22.31 50.21,28.69 50.71,28.69 51.21,28.69 51.71,28.69 52.21,28.69 52.71,28.69 49.71,28.69 10.75,3.3 18.52,3.25 19.4,3.25 20.27,3.25 21.15,3.25 22.02,3.25 22.9,3.25 23.77,3.25 24.65,3.25 18.27,32.75 19.15,32.75 20.02,32.75 20.9,32.75 21.77,32.75 22.65,32.75 23.52,32.75 24.4,32.75 25.27,32.75 26.15,32.75 35.65,22.25 36.15,22.25 36.65,22.25 37.15,22.25 37.65,22.25 38.15,22.25 38.65,22.25 39.15,22.25 39.65,22.25 40.15,22.25 40.65,22.25 55.65,28 25.65,7.75 26.15,7.75 26.65,7.75 27.15,7.75 25.15,7.75 24.65,7.75 24.15,7.75 50.21,7.44 50.71,7.44 51.21,7.44 51.71,7.44 52.21,7.44 52.71,7.44 49.71,7.44 50.21,13.56 50.71,13.56 51.21,13.56 51.71,13.56 52.21,13.56 52.71,13.56 49.71,13.56 26.15,12.5 26.65,12.5 27.15,12.5 55.65,8 16.4,5.5 9.9,5.5 51.77,30.5 52.65,30.5 53.52,30.5 54.4,30.5 55.27,30.5 56.15,30.5 57.02,30.5 57.9,30.5 58.77,30.5 51.65,5.62 52.52,5.62 53.4,5.62 54.27,5.62 55.15,5.62 56.02,5.62 56.9,5.62 57.77,5.62 58.65,5.62 51.65,4.62 52.52,4.62 53.4,4.62 54.27,4.62 55.15,4.62 56.02,4.62 56.9,4.62 57.77,4.62 58.65,4.62 51.65,3.62 52.52,3.62 53.4,3.62 54.27,3.62 55.15,3.62 56.02,3.62 56.9,3.62 57.77,3.62 58.65,3.62 51.77,31.5 52.65,31.5 53.52,31.5 54.4,31.5 55.27,31.5 56.15,31.5 57.02,31.5 57.9,31.5 58.77,31.5 51.77,32.5 52.65,32.5 53.52,32.5 54.4,32.5 55.27,32.5 56.15,32.5 57.02,32.5 57.9,32.5 58.77,32.5 18.27,33.75 19.15,33.75 20.02,33.75 20.9,33.75 21.77,33.75 22.65,33.75 23.52,33.75 24.4,33.75 25.27,33.75 26.15,33.75 18.27,34.75 19.15,34.75 20.02,34.75 20.9,34.75 21.77,34.75 22.65,34.75 23.52,34.75 24.4,34.75 25.27,34.75 26.15,34.75 18.52,2.25 19.4,2.25 20.27,2.25 21.15,2.25 22.02,2.25 22.9,2.25 23.77,2.25 24.65,2.25 18.52,1.25 19.4,1.25 20.27,1.25 21.15,1.25 22.02,1.25 22.9,1.25 23.77,1.25 24.65,1.25 42.27,34.25 43.02,34.25 43.77,34.25 44.52,34.25 45.27,34.25 58.27,25.38 57.9,25 57.9,25.75 57.52,24.62 57.15,24.25 56.65,24.5 56.9,25 56.9,25.75 56.65,26.25 57.52,26.12 57.15,26.5 3.15,10.75 3.15,11.62 3.15,12.38 3.15,13.25 23.77,28.38 24.27,28.38 24.77,28.38 25.27,28.38 25.77,28.38 26.27,28.38 26.77,28.38 29.9,28.5 30.4,28.5 30.9,28.5 31.4,28.5 31.9,28.5 32.4,28.5 32.9,28.5 33.4,28.5 33.9,28.5 34.4,28.5 29.9,8 30.4,8 30.9,8 29.9,7.5 30.4,7.5 30.9,7.5 31.4,7.5 31.9,7.5 32.4,7.5 32.9,7.5 33.4,7.5 33.9,7.5 34.4,7.5 27.65,7.75 51.71,14.81 52.21,14.81 52.71,14.81 53.21,13.56 53.21,7.44 49.21,7.44 53.21,22.31 51.71,21.19 52.21,21.19 52.71,21.19 53.21,21.19 53.21,14.81 49.21,28.69 53.21,28.69 53.71,28.69 53.71,22.31 34.9,28.5 35.4,28.5 34.9,7.5 35.4,7.5 35.9,7.5 36.4,7.5 29.4,28.5 28.9,28.5 28.4,28.5 27.9,28.5 27.4,28.5 29.4,7.5 28.9,7.5 28.4,7.5 50.9,30.5 50.02,30.5 49.15,30.5 48.27,30.5 47.4,30.5 46.52,30.5 45.65,30.5 50.77,5.62 49.9,5.62 49.02,5.62 48.15,5.62 47.27,5.62 46.4,5.62 45.52,5.62 35.9,28.5 36.4,28.5 53.71,13.56 53.71,14.81 53.71,21.19 53.71,20.69 53.71,20.19 53.71,15.31 53.71,15.81 53.71,22.81 53.71,23.44 53.71,13.06 53.71,12.56 53.71,7.44 53.71,7.94 53.71,8.44 53.71,28.19 53.71,27.69 48.71,28.69 48.71,7.44 23.27,28.38 23.27,29 23.27,28.38
  pour Top (rank 6): 0.52,39.98 65.35,39.08 65.35,-5.32 0.4,-4.18
  pour Route2 (rank 6): -1,41.48 66.35,41.23 66.35,-5.52 -1.25,-5.4
  pour Route15 (rank 6): -0.75,44.38 68.9,46 68.9,-9.9 -0.75,-11.52
  pour Bottom (rank 6): 0.35,43.05 69.65,43.08 70.15,-7.35 0.85,-7.38
  pour Route3 (rank 6): -0.48,39.6 70.6,39.83 70.6,-4.57 -0.48,-4.8
  pour Route14 (rank 6): -1.98,38.85 66.97,38.58 66.97,-5.82 -1.98,-5.55
N$1
  Top 0.5: S$16.1 U$16.HF
N$2
  Top 0.5: U$21.HF S$21.1
N$4
  Top 0.5: U$4.HF S$4.1
N$5
  Top 0.5: U$9.HF S$9.1
N$6
  Top 0.5: G1.1 U$2.RF$1 U$2.RF$2 44.27,18 G2.1
N$7
  Top 0.5: S$6.1 36.52,31 arc-90 38.15,29.38 U$6.HF
N$8
  Top 0.5: S$18.1 36.52,5 arc90 38.15,6.62 U$18.HF

## Text on the board
tPlace: IST Austria | LED1 | G1 | G2 | LED24 | RF-BOARD V4.01 / ResonatorPCB / Marian&Oliver
bPlace: 1 | 13 | 24 | 12 | R | C | GND | C | R